# EAGLE board bottom (EAGLE 7.6.0)
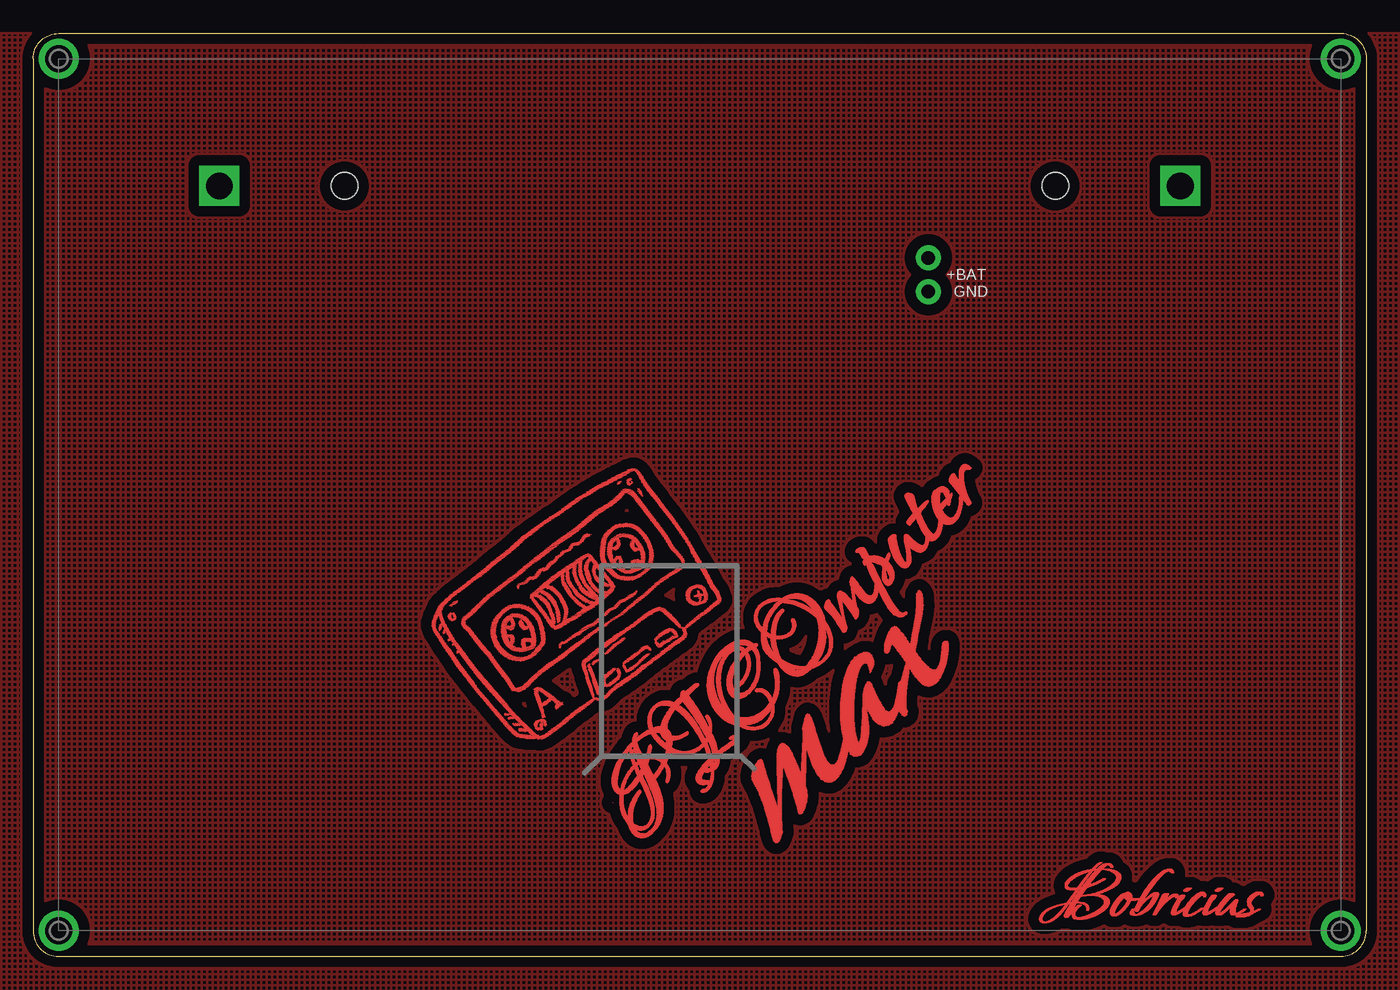
[diagram p0: board, top side]
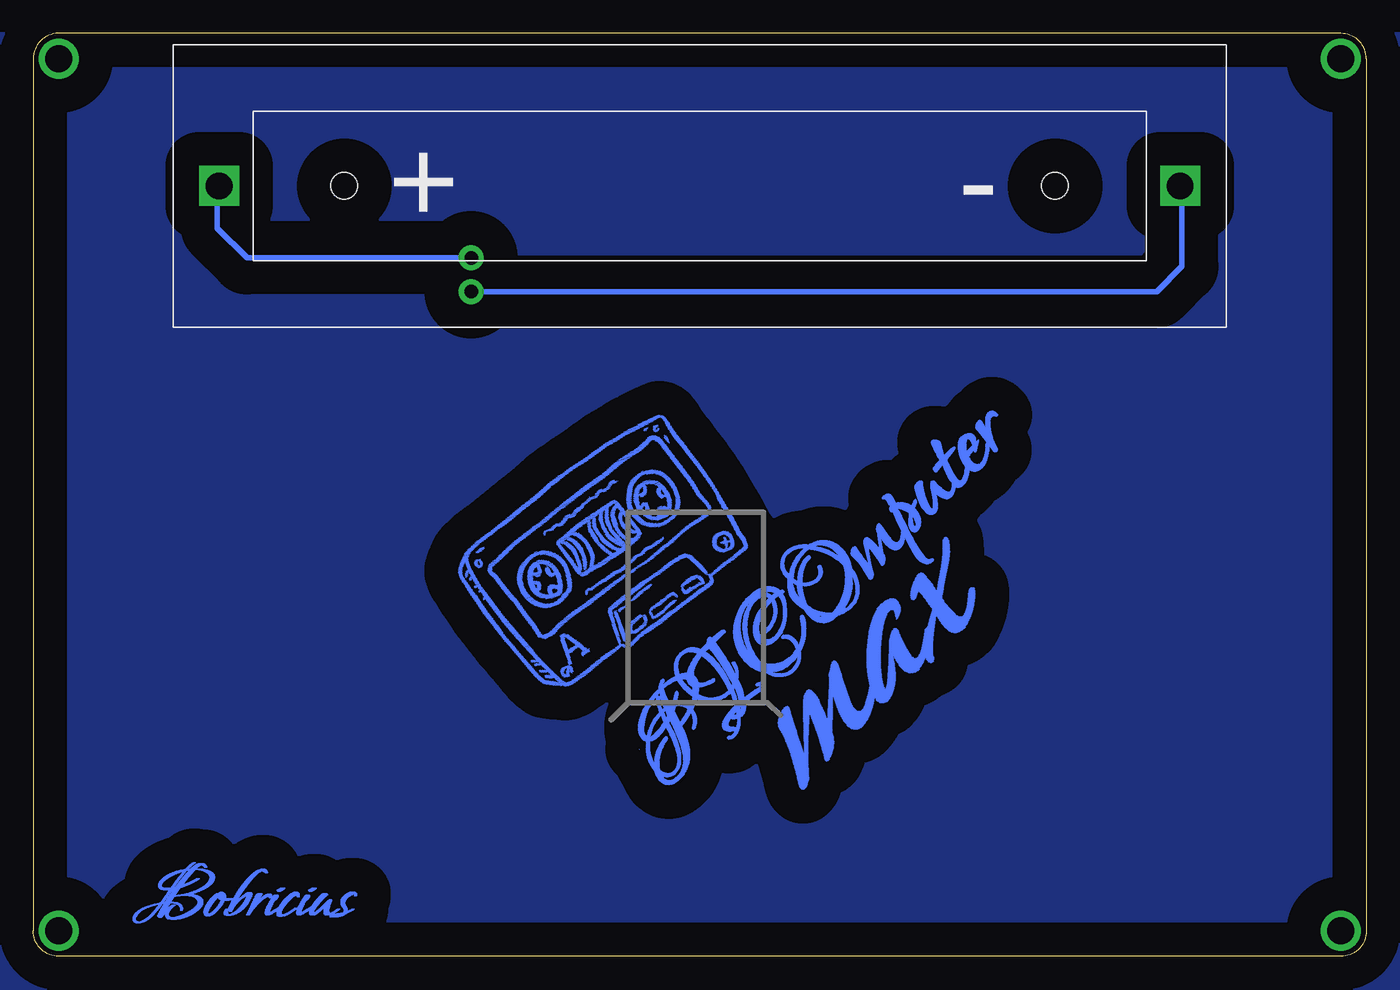
[diagram p1: board, bottom side, seen from below]

Size 100.01 x 69.22 mm. Coordinates in mm from the lower left corner, seen from the top.
Outline: 1.91,0 98.11,0 arc91 100.01,1.9 100.01,67.31 arc95 97.95,69.22 1.91,69.22 arc91 0,67.31 0,1.9 arc95 1.91,0
Copper layers (1*16): Top 0.0356mm / dielectric 1.5011mm / Bottom 0.0356mm
Design rules "LaenPCBOrder *": minimum track width 6mil, minimum drill 13mil, track to track 6mil, track to pad 6mil, pad to pad 6mil, via to via 6mil, smd to smd 6mil, copper to edge 15mil, drill to drill 6mil, minimum pad ring 7mil, minimum via ring 7mil, stop-mask expansion 4mil, vias tented up to drill 30mil, thermal gap 10mil
Net classes: 0 vcc: width 0.203 mm, drill 0.356 mm, clearance 0.254 mm; 1 gnd: width 0.203 mm, drill 0.356 mm, clearance 0.254 mm; 2 xxx: width 0.203 mm, drill 0.356 mm, clearance 0.254 mm

## Footprints (pad centres in the part's own frame; a part is rotated, then mirrored left to right if it is on the bottom)
18650_HOLDER_SINGLE_THROUGH-HOLE = drill 2 square: CON(+) -36.05,0; CON(-) 36.05,0 | hole 2: 26.67,0; -26.67,0
1X02_NO_SILK = drill 1.016 pad 1.88: 1 0,0; 2 2.54,0

## Placement (x,y rotation side)
BT1  [18650_HOLDER_SINGLE_THROUGH-HOLE]  50.01,57.78 0 bottom
J4  [1X02_NO_SILK]  67.16,49.84 90 top

## Library data of the parts
BT1 = Batteries
J4 = SparkFun-Connectors

## Nets
N$1: BT1.CON(-) J4.1
N$19: BT1.CON(+) J4.2

## Tracks (layer width: path | path; a pad name or v marks a point on that pad's centre or on a via)
N$1
  Bottom 0.406: J4.1 15.72,49.84 13.82,51.74 13.82,57.63 BT1.CON(-)
N$5  (via drill 2)
  other vias: 1.91,67.31
N$6
  pour Top (isolate 0.813, hatched): -3.49,69.22 -3.49,-4.45 103.19,-4.45 103.19,69.22
  pour Bottom (isolate 2.54): 103.19,69.22 103.19,-4.45 -3.49,-4.45 -3.49,69.22
N$19
  Bottom 0.406: J4.2 83.98,52.38 86.21,54.6 86.21,57.63 BT1.CON(+)
N$20  (via drill 2)
  other vias: 98.11,1.9
N$22  (via drill 2)
  other vias: 98.11,67.31
N$23  (via drill 2)
  other vias: 1.91,1.9
(copper drawn outside any net)
  shapes: Bottom area x10124, Top area x10124

## Text on the board
tNames: +BAT | GND
bStop: Please focus on the direction of battery, / if you reversely connecting the battery, / the charging circuit will be damaged, / so please pay attention to it when / you mounting the battery.